# Altium PCB PCB1.PcbDoc (part 2 of 2)
Units mil, origin at the board's own origin, x right, y up, seen from the top; angles counter-clockwise.
Board outline 6000 x 4000 mil, 2 copper layers (Top Layer, Bottom Layer); 116 components, 72 nets, 335 pads, 101 vias.
Unrouted connection lines stored in the file: 3.
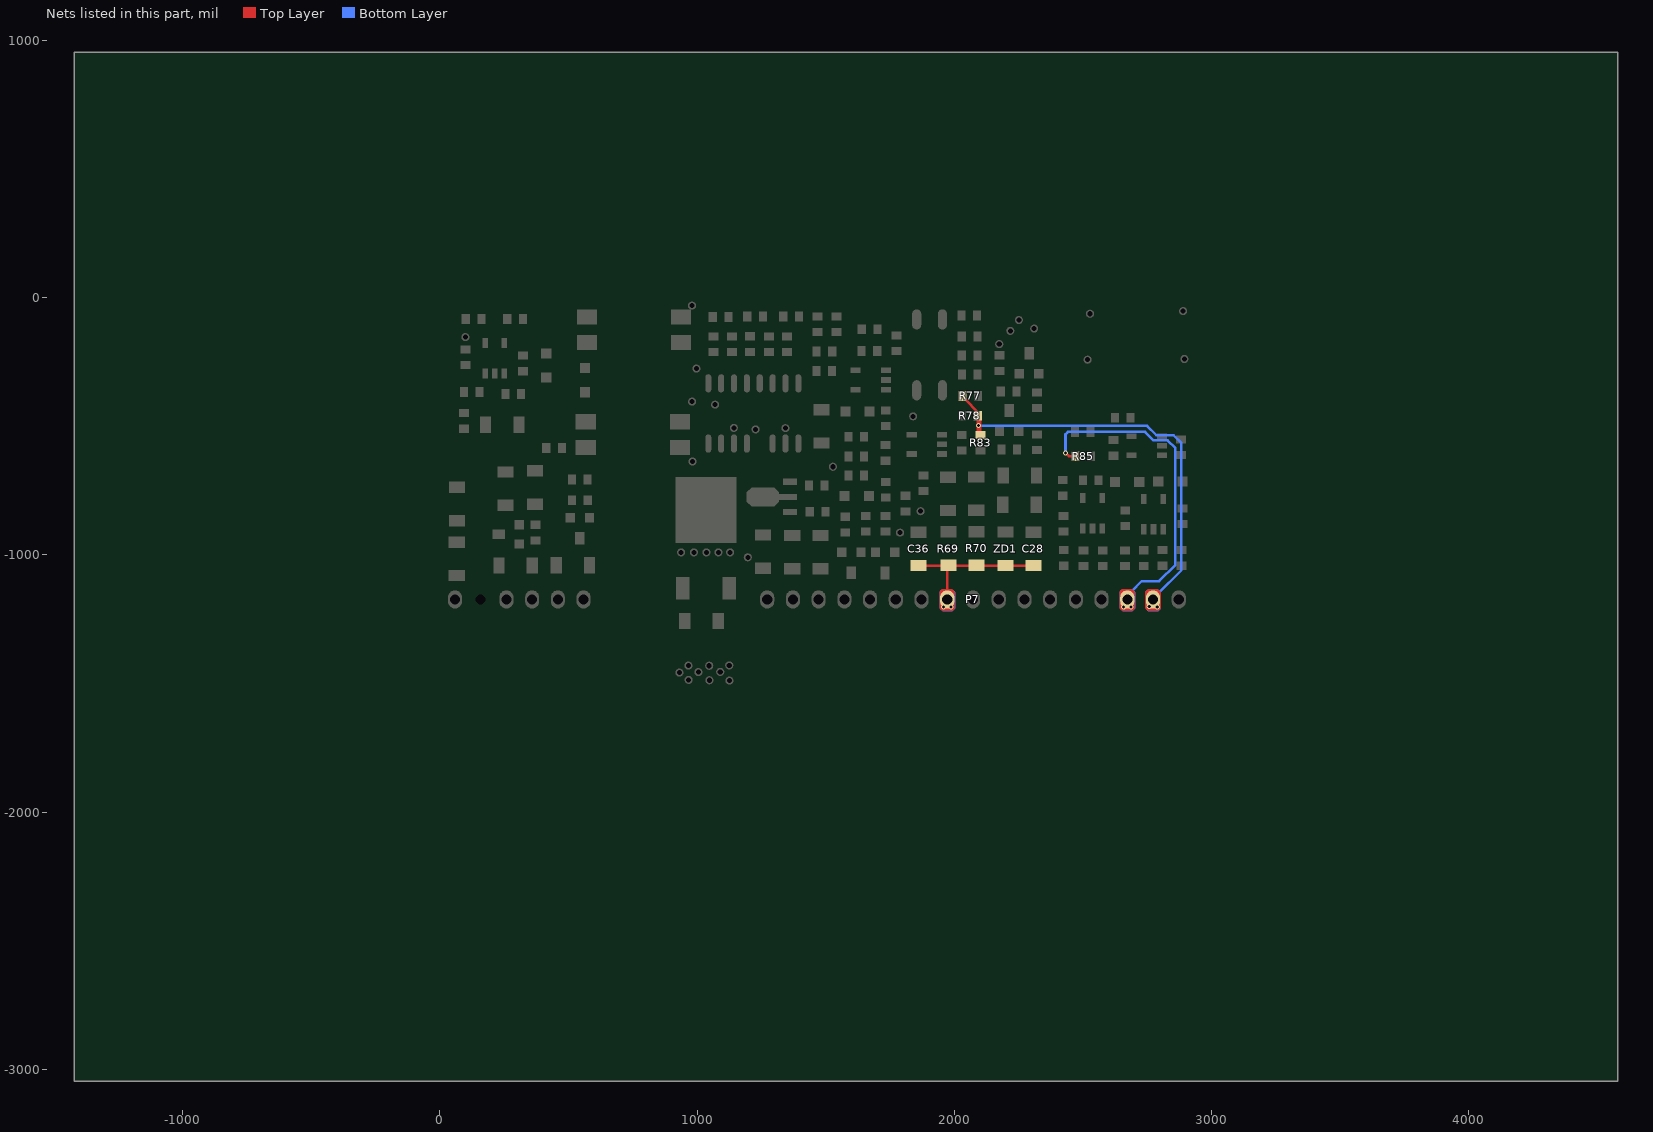
[diagram p2: the nets of this part, all layers, seen from the top]

## Via types
v1: diameter 19.68, hole 11.81, Top Layer to Bottom Layer, 101 vias

## Nets (pads, with @x,y where several pads share a name; then routed paths per layer and width w, separated by ;. In a path a pad name is that pad's centre, name@x,y a point inside that pad or via, vN(x,y) a via of type N, cw(c..) or ccw(c..) an arc to the next point about the centre after c; other vN are vias at no path point) (continued)
RX: P7.26 R77.1 R78.2 R83.1 | length 1794.7
  Top Layer w10: R77.1@2039.37,-376.97 2039.37,-391.93 2095.08,-447.64 2100.79,-447.64 2100.79,-527.17 R83.1@2105.12,-531.5 ; P7.26@2767.13,-1167.32 P7.26@2772.83,-1173.03
  Top Layer w19.68: R83.1@2097.05,-525.98 R78.2@2097.05,-452.56
  Bottom Layer w10: v1@2093.11,-498.43 2749.41,-498.43 2786.02,-535.04 2852.56,-535.04 2882.87,-565.35 2882.87,-1059.84 2790.35,-1152.36 2773.82,-1152.36 2773.82,-1177.16 P7.26@2781.1,-1184.45 ; P7.26@2772.83,-1173.03 2772.83,-1144.69 P7.26@2776.57,-1140.95
  other v1: 2789.17,-1202.76 2758.07,-1201.57 2095.08,-497.64
TX: P7.25 R85.2 | length 1250.7
  Top Layer w10: v1(2432.48,-603.15) 2445.87,-616.54 R85.2@2471.06,-616.54 ; P7.25@2672.83,-1173.03 P7.25@2681.69,-1164.17
  Bottom Layer w10: v1@2432.48,-602.36 2432.48,-531.5 2441.93,-522.05 2742.32,-522.05 2775.39,-555.12 2827.76,-555.12 ; P7.25@2688.39,-1142.91 2728.94,-1102.36 2795.87,-1102.36 2859.25,-1038.98 2859.25,-585.43 2828.94,-555.12
  other v1: 2658.86,-1202.76 2686.42,-1202.36
V+: C28.1 C36.1 P7.18 R69.1 R70.1 ZD1.2 | length 581.1
  Top Layer w10: C36.1@1861.42,-1041.57 C28.1@2307.87,-1041.57 ; P7.18@1972.83,-1173.03 1972.83,-1045.12 R69.1@1977.56,-1040.39
  other v1: 1958.46,-1202.36 1987.2,-1202.36
pads on no net: P7.19 P10.2
copper on no net: | length 78233.2
  Top Layer w7.87: 97.83,-449.61 134.05,-449.61 160.04,-475.59 160.04,-518.9 116.34,-562.6 116.34,-688.58 117.91,-690.16 186.42,-690.16 192.32,-684.25 192.32,-615.75 210.83,-597.24 317.13,-597.24 330.91,-583.46 330.91,-555.12 326.97,-551.18 258.86,-551.18 199.02,-491.34 ; 444.29,-679.13 466.34,-701.18 474.21,-701.18 ; 444.68,-687.8 452.56,-695.67 505.71,-695.67 510.43,-700.39 510.43,-701.97 ; 445.08,-522.05 480.51,-486.61 495.87,-486.61 ; 446.26,-696.85 460.04,-710.63 512.8,-710.63 ; 449.8,-696.06 449.8,-700.39 470.28,-720.87 504.13,-720.87 497.83,-714.57 471.46,-714.57 ; 513.98,-481.5 524.21,-481.5 530.12,-475.59 530.12,-478.35 533.27,-481.5 499.41,-481.5 495.08,-477.17 521.85,-477.17 528.94,-470.08 496.65,-470.08 484.45,-482.28 512.8,-482.28 530.91,-464.17 495.87,-464.17 469.09,-490.95 469.09,-495.28 471.46,-492.91 531.69,-492.91 530.12,-491.34 471.85,-491.34 475,-488.19 539.96,-488.19 ; 533.27,-503.15 453.35,-503.15 443.9,-512.6 443.9,-512.2 495.87,-460.24 551.38,-460.24 560.83,-469.69 560.83,-474.02 ; 578.94,-832.68 587.6,-841.34 595.87,-841.34 580.91,-826.38 580.91,-712.2 579.33,-710.63 574.21,-710.63 570.28,-714.57 570.28,-845.67 580.51,-855.91 580.91,-855.91 ; 580.91,-785.04 580.91,-716.54 582.87,-714.57 582.87,-839.76 589.96,-846.85 ; 1540.75,-653.94 1545.08,-653.94 1573.03,-681.89 1573.03,-697.24 ; 1575,-703.54 1542.72,-671.26 1519.88,-671.26 1514.76,-666.14 1514.76,-650.39 1522.64,-642.52 1537.99,-642.52 1581.3,-685.83 1584.05,-685.83 ; 1590.35,-175.98 1590.35,-55.12 1595.87,-49.61 1802.17,-49.61 1818.53,-65.97 ; 1593.11,-64.57 1602.56,-55.12 1785.63,-55.12 1786.02,-54.72 ; 1593.5,-60.24 1593.5,-58.27 1599.02,-52.76 ; 1725.39,-369.69 1725.39,-357.09 1728.15,-354.33 1719.49,-362.99 1719.49,-375.2 1723.03,-378.74 1745.08,-378.74 1750.2,-373.62 1750.2,-364.57 1744.29,-370.47 1744.29,-371.26 ; 1737.99,-356.69 1740.75,-353.94 1744.68,-353.94 1750.59,-359.84 1750.59,-383.46 ; 1821.04,-409.82 1822.22,-409.82 1823.82,-411.42 1823.82,-471.26 1829.33,-476.77 1847.05,-476.77 1854.53,-469.29 1854.53,-441.73 1831.69,-418.9 1831.69,-449.21 1830.51,-450.39 1830.51,-447.24 1841.93,-435.83 1841.93,-444.88 1849.02,-451.97 1849.02,-441.73 1846.26,-438.98 1845.87,-438.98 ; 1823.03,-70.47 1814.76,-62.2 1803.74,-62.2 1818.31,-76.77 1818.31,-85.04 1789.17,-55.91 1789.17,-55.12 1791.14,-53.15 1824.61,-53.15 ; 1833.27,-49.61 1789.17,-49.61 1778.94,-59.84 1783.27,-59.84 1831.69,-108.27 1856.89,-108.27 1860.83,-104.33 1860.83,-74.41 ; 1878.15,-636.61 1878.15,-659.84 1893.9,-675.59 ; 1937.2,-523.23 1939.17,-521.26 2002.95,-521.26 2026.57,-497.64 2026.57,-474.8 ; 1949.8,-572.44 1979.72,-572.44 2005.71,-598.43 2005.71,-619.69 2009.25,-623.23 2178.94,-623.23 2194.29,-607.87 2186.02,-607.87 2175.79,-618.11 2013.98,-618.11 2010.43,-614.57 2010.43,-601.57 2013.98,-605.12 2013.98,-611.81 2176.97,-611.81 ; 1954.92,-568.5 1957.28,-568.5 1958.46,-569.69 1988.39,-569.69 2001.77,-583.07 2179.72,-583.07 ; 2023.82,-512.2 2009.25,-526.77 2002.56,-526.77 2027.56,-501.77 2027.56,-493.31 ; 2029.33,-384.65 2029.33,-388.19 2081.69,-440.55 ; 2032.48,-465.35 2032.48,-516.14 2037.6,-521.26 2037.6,-464.57 2037.99,-464.17 ; 2093.9,-466.14 2095.08,-467.32 2095.08,-502.36 2115.94,-523.23 ; 2528.15,-416.93 2501.77,-416.93 2495.47,-410.63 2495.47,-284.25 2556.5,-223.23 2556.5,-220.08 ; 2587.2,-131.1 2580.51,-131.1 2495.47,-216.14 2495.47,-392.91 2519.49,-416.93 2730.12,-416.93 2742.72,-429.53 2742.72,-461.02 2753.74,-472.05 2906.89,-472.05 2919.49,-459.45 2919.49,-234.25
  Top Layer w10: 1200.98,-1276.77 1200.98,-1271.65 1208.86,-1263.78 ; 1215.54,-1074.8 1215.54,-1078.73 1223.03,-1086.22 1282.48,-1086.22
  Top Layer w11.81: 1111.61,-1325.98 1135.63,-1325.98 1157.28,-1304.33 1157.28,-1227.17 1176.97,-1207.48 1200.2,-1207.48 1214.76,-1192.91 1214.76,-1150 1228.15,-1136.61 1287.6,-1136.61 1293.5,-1142.52 ; 1146.26,-1133.07 1150.59,-1133.07 1190.75,-1092.91 1303.35,-1092.91 ; 1173.03,-1089.37 1216.73,-1089.37 1220.67,-1085.43 ; 1466.34,-1039.37 1466.34,-1036.61 1478.54,-1024.41 1510.83,-1024.41 1515.16,-1028.74 1515.16,-1031.1 ; 1495.47,-1051.18 1495.47,-1050.39 1518.7,-1027.17 ; 1568.31,-933.07 1586.02,-950.79 1688.39,-950.79 1703.35,-965.75 1703.35,-980.32 1694.69,-988.98 1693.5,-988.98 1683.27,-978.74 1683.27,-959.06 1676.97,-952.76 ; 2254.92,-1196.06 2254.92,-1238.19 2270.67,-1253.94 2479.72,-1253.94 2486.42,-1247.24 2486.42,-1220.47 2461.22,-1245.67 2461.22,-1246.85 2465.95,-1242.13 2476.97,-1242.13 2478.15,-1240.94 2478.15,-1220.47 2476.97,-1221.65 2476.97,-1239.37 2458.07,-1220.47 2458.07,-1219.69 2458.46,-1220.08 2458.46,-1235.04 2469.49,-1224.02 2469.49,-1216.14 ; 2269.49,-1173.62 2267.13,-1173.62 2249.02,-1191.73 2249.02,-1244.09 2268.31,-1263.39 2486.42,-1263.39 2495.87,-1253.94 2495.87,-1185.04 2486.02,-1175.2 2466.73,-1175.2 2449.41,-1192.52 2449.41,-1235.04 2434.84,-1249.61 2310.04,-1249.61 2295.87,-1235.43 2295.87,-1183.46 ; 2275,-1239.76 2275,-1227.95 2281.69,-1221.26 2281.69,-1243.7 2284.45,-1246.46 2275.39,-1246.46 2266.34,-1237.4 2266.34,-1222.05 2271.85,-1216.54 2284.84,-1216.54 2292.32,-1224.02 2292.32,-1248.03
  Top Layer w19.68: 43.5,-504.33 43.5,-719.69 57.28,-733.46 64.76,-733.46 ; 43.5,-347.24 56.1,-359.84 88.78,-359.84 90.75,-361.81 90.75,-370.87 89.96,-371.65 48.23,-371.65 45.47,-368.9 50.2,-364.17 91.54,-364.17 ; 43.5,-118.11 43.5,-88.58 56.5,-75.59 99.02,-75.59 99.02,-88.19 98.62,-88.58 64.37,-88.58 43.5,-109.45 43.5,-513.39 48.62,-518.5 86.42,-518.5 92.72,-512.2 ; 44.69,-383.86 63.58,-364.96 88.39,-364.96 ; 45.47,-498.43 54.53,-507.48 93.9,-507.48 87.2,-514.17 44.69,-514.17 52.95,-522.44 52.95,-726.38 ; 47.44,-1168.5 44.69,-1165.75 44.69,-1085.83 46.85,-1083.66 62.83,-1083.66 65.94,-1086.77 65.94,-1135.43 76.18,-1145.67 ; 53.35,-1141.34 53.35,-1119.29 81.3,-1091.34 ; 57.68,-879.13 51.77,-885.04 51.77,-942.52 56.89,-937.4 56.89,-874.8 58.46,-873.23 76.18,-873.23 77.76,-874.8 77.76,-939.76 63.58,-925.59 63.58,-874.8 63.19,-875.2 63.19,-943.7 ; 68.31,-735.04 68.31,-533.86 88.39,-513.78 86.42,-513.78 56.1,-544.09 56.1,-738.19 60.83,-733.46 78.94,-733.46 78.94,-538.19 98.23,-518.9 ; 82.87,-257.09 78.94,-261.02 78.94,-298.03 98.23,-278.74 98.23,-260.63 ; 84.05,-271.26 84.05,-292.52 78.54,-298.03 86.02,-298.03 127.76,-256.3 ; 85.24,-437.8 87.6,-435.43 145.87,-435.43 198.23,-487.8 198.23,-441.73 248.62,-391.34 248.62,-375.2 247.83,-374.41 244.69,-374.41 213.39,-343.11 213.39,-305.51 213.39,-334.06 187.99,-359.45 160.83,-359.45 151.77,-368.5 151.77,-397.24 113.58,-435.43 107.68,-435.43 93.5,-449.61 165.55,-449.61 171.06,-455.12 171.06,-492.52 191.93,-513.39 213.39,-491.93 213.39,-263.19 203.74,-253.54 110.43,-253.54 104.92,-259.06 106.5,-259.06 ; 88.39,-366.93 88.39,-351.97 125.79,-314.57 169.49,-314.57 173.43,-310.63 173.43,-291.34 167.91,-285.83 167.91,-297.24 156.1,-309.06 ; 89.57,-441.73 134.45,-441.73 173.03,-480.32 ; 89.96,-261.81 88.78,-261.81 78.54,-272.05 78.54,-297.64 117.13,-259.06 117.52,-259.06 ; 97.05,-194.49 105.31,-194.49 108.07,-197.24 180.91,-197.24 204.92,-221.26 312.8,-221.26 ; 100.98,-153.54 100.98,-192.52 99.8,-193.7 162.8,-193.7 174.61,-181.89 174.61,-170.87 173.43,-169.69 173.43,-173.23 158.46,-188.19 93.11,-188.19 95.47,-185.83 95.47,-155.12 96.26,-155.91 96.26,-172.44 112.01,-188.19 ; 107.68,-264.57 115.55,-264.57 124.61,-255.51 ; 137.6,-640.16 137.6,-560.24 175.79,-522.05 205.31,-522.05 245.08,-561.81 319.88,-561.81 319.49,-562.2 319.49,-577.17 310.83,-585.83 215.94,-585.83 182.09,-619.69 182.09,-677.56 181.69,-677.95 125.39,-677.95 128.15,-675.2 128.15,-563.78 137.2,-572.83 137.2,-668.11 143.5,-661.81 166.73,-661.81 169.49,-659.06 169.49,-606.69 204.13,-572.05 302.56,-572.05 295.87,-565.35 258.07,-565.35 239.57,-546.85 191.93,-546.85 186.42,-541.34 203.74,-541.34 205.71,-539.37 205.71,-543.31 221.85,-559.45 156.1,-559.45 141.14,-574.41 141.14,-645.28 148.23,-652.36 148.23,-573.62 161.22,-560.63 162.8,-560.63 178.94,-544.49 184.45,-538.98 184.45,-534.25 159.25,-559.45 159.25,-647.24 162.4,-644.09 162.4,-590.55 183.66,-569.29 169.49,-569.29 167.52,-571.26 ; 158.46,-420.47 165.94,-427.95 165.94,-548.03 ; 158.86,-83.07 254.53,-83.07 262.4,-90.94 262.4,-183.46 260.83,-185.04 252.17,-176.38 252.17,-97.64 242.32,-87.8 162.01,-87.8 171.46,-78.35 260.83,-78.35 ; 174.57,-426.74 174.57,-422.08 202.56,-394.09 182.87,-394.09 160.04,-416.93 164.76,-416.93 193.9,-446.06 171.06,-446.06 162.8,-437.8 180.91,-437.8 238.78,-379.92 173.03,-379.92 168.7,-375.59 168.7,-391.73 143.9,-416.54 143.9,-422.83 189.96,-468.9 189.96,-473.23 ; 175.79,-524.02 175.79,-457.09 ; 193.11,-516.54 193.11,-495.28 199.02,-489.37 199.02,-501.18 236.81,-538.98 ; 194.29,-502.36 194.29,-416.14 ; 223.82,-913.78 212.4,-925.2 212.4,-1059.84 214.37,-1061.81 214.37,-1054.33 227.36,-1041.34 227.36,-927.95 ; 224.61,-880.71 224.61,-894.09 241.54,-911.02 241.54,-876.38 236.42,-871.26 217.91,-871.26 212.4,-876.77 212.4,-1023.62 226.18,-1037.4 228.54,-1037.4 ; 230.91,-892.91 230.91,-901.97 240.75,-911.81 240.75,-1032.28 ; 240.35,-813.78 243.5,-813.78 269.09,-839.37 ; 245.47,-812.99 251.77,-812.99 270.28,-831.5 ; 248.23,-670.87 233.27,-670.87 226.18,-663.78 226.18,-636.61 236.02,-626.77 370.67,-626.77 407.28,-590.16 407.28,-318.11 414.76,-325.59 414.76,-588.58 409.25,-594.09 409.25,-673.62 395.47,-687.4 228.94,-687.4 226.18,-684.65 226.18,-660.24 230.91,-655.51 230.91,-651.57 238.39,-644.09 368.31,-644.09 393.11,-619.29 393.11,-638.58 384.45,-647.24 257.68,-647.24 246.65,-658.27 339.57,-658.27 347.44,-666.14 286.02,-666.14 285.63,-665.75 ; 307.68,-881.89 365.94,-881.89 370.28,-877.56 370.28,-808.27 376.18,-802.36 ; 308.46,-484.25 319.09,-473.62 319.09,-328.74 293.11,-302.76 262.4,-302.76 255.71,-296.06 255.71,-295.28 268.7,-282.28 313.58,-282.28 ; 310.04,-959.06 314.76,-959.06 329.33,-944.49 369.88,-944.49 367.91,-946.46 332.48,-946.46 321.46,-957.48 ; 310.19,-956.66 310.19,-957.33 317.43,-964.57 377.76,-964.57 381.69,-960.63 ; 312.44,-489.33 312.44,-283.42 ; 314.76,-376.77 314.76,-357.09 319.09,-352.76 319.09,-302.76 ; 324.61,-223.62 324.61,-222.05 325.79,-220.87 386.02,-220.87 399.02,-207.87 ; 325,-220.87 408.07,-220.87 411.22,-217.72 ; 326.97,-78.74 553.35,-78.74 557.68,-83.07 ; 333.27,-155.12 306.89,-155.12 301.38,-149.61 301.38,-133.86 302.95,-132.28 358.46,-132.28 373.43,-117.32 483.66,-117.32 503.74,-137.4 503.74,-217.72 513.19,-227.17 513.19,-299.61 495.87,-316.93 475.79,-316.93 467.13,-308.27 467.13,-191.73 445.47,-170.08 306.5,-170.08 301.38,-164.96 301.38,-143.31 304.13,-140.55 370.28,-140.55 382.09,-128.74 469.88,-128.74 492.32,-151.18 492.32,-228.35 499.02,-235.04 499.02,-290.16 487.6,-301.57 477.76,-301.57 481.3,-298.03 481.3,-162.6 471.46,-152.76 333.66,-152.76 344.68,-141.73 463.98,-141.73 472.24,-150 472.24,-177.56 457.28,-162.6 455.71,-162.6 ; 336.02,-790.95 336.02,-782.28 339.96,-778.35 504.53,-778.35 515.16,-788.98 517.91,-788.98 518.7,-788.19 518.7,-870.87 496.26,-893.31 486.42,-893.31 481.3,-888.19 317.52,-888.19 316.73,-887.4 475.39,-887.4 514.37,-848.43 514.37,-781.5 512.4,-779.53 342.32,-779.53 336.02,-785.83 336.02,-844.88 307.68,-873.23 302.95,-873.23 307.68,-877.95 365.16,-877.95 ; 364.37,-1047.24 364.37,-1066.54 454.13,-1156.3 454.13,-1166.54 ; 446.26,-1016.93 529.72,-933.46 538.39,-933.46 ; 455.71,-1030.32 455.71,-1014.17 536.81,-933.07 536.81,-934.65 542.32,-940.16 542.32,-942.91 459.25,-1025.98 ; 470.28,-599.21 495.08,-624.02 495.08,-631.89 ; 489.17,-605.91 505.31,-622.05 530.51,-622.05 528.94,-623.62 488.78,-623.62 501.77,-610.63 536.42,-610.63 536.42,-592.13 480.12,-592.13 477.36,-594.88 477.36,-638.19 481.3,-642.13 526.18,-642.13 575.79,-592.52 579.72,-592.52 ; 498.8,-888.8 513.98,-873.62 513.98,-786.61 506.89,-779.53 500.59,-779.53 495.08,-785.04 495.08,-892.52 508.86,-878.74 508.86,-791.73 ; 513.58,-362.99 523.43,-372.83 558.46,-372.83 564.76,-366.54 564.76,-362.6 ; 534.05,-564.17 521.85,-576.38 479.33,-576.38 478.54,-575.59 559.65,-575.59 563.98,-579.92 ; 550.59,-194.09 564.37,-207.87 564.37,-268.5 566.34,-266.54 566.34,-171.65 ; 555.32,-1166.54 555.32,-1143.7 571.46,-1127.56 571.46,-1068.5 584.06,-1055.91 584.06,-1055.51 582.87,-1056.69 582.87,-1125.98 566.34,-1142.52 ; 562.01,-362.2 560.83,-361.02 512.8,-361.02 517.52,-365.75 562.8,-365.75 ; 565.16,-266.93 565.16,-211.02 582.48,-193.7 ; 568.7,-1168.9 568.7,-1144.49 588.39,-1124.8 588.39,-1066.54 ; 917.52,-487.8 917.52,-467.72 981.69,-403.54 981.69,-407.48 925.79,-463.39 ; 918.7,-702.76 918.7,-692.13 920.28,-690.55 1128.54,-690.55 1163.58,-655.51 1065.16,-655.51 1045.87,-674.8 1051.38,-669.29 1131.69,-669.29 1120.28,-680.71 1056.5,-680.71 ; 926.57,-77.56 926.57,-76.77 977.76,-25.59 ; 932.09,-600 976.97,-644.88 989.96,-644.88 991.54,-643.31 991.54,-628.74 944.29,-581.5 936.02,-581.5 ; 934.84,-476.77 934.84,-467.32 989.17,-412.99 989.17,-398.43 986.42,-395.67 973.03,-395.67 970.28,-398.43 970.28,-418.9 ; 936.42,-269.69 936.81,-269.69 942.72,-263.78 1000.98,-263.78 1007.28,-270.08 1007.28,-279.53 1001.38,-285.43 965.94,-285.43 ; 940.75,-1092.13 967.13,-1092.13 970.67,-1095.67 970.67,-1273.62 1023.03,-1325.98 1208.86,-1325.98 1252.56,-1282.28 1252.56,-1177.56 1270.28,-1159.84 1290.16,-1159.84 1293.7,-1163.39 1293.7,-1323.82 1281.69,-1335.83 940.35,-1335.83 914.37,-1309.84 914.37,-1092.52 914.76,-1092.13 944.29,-1092.13 954.13,-1101.97 954.13,-1121.65 948.23,-1127.56 948.23,-1144.09 ; 952.17,-78.74 952.17,-67.72 984.06,-35.83 ; 959.65,-1018.11 1003.35,-1018.11 1032.87,-1047.64 1032.87,-1214.57 1073.03,-1254.72 ; 970.28,-285.43 940.75,-285.43 936.42,-281.1 936.42,-270.08 942.32,-264.17 988.39,-264.17 994.68,-270.47 994.68,-271.65 ; 985.63,-1016.54 1018.31,-1016.54 1035.63,-1033.86 1035.63,-1213.78 1076.97,-1255.12 1091.93,-1255.12 1092.32,-1254.72 1087.2,-1254.72 1041.93,-1209.45 1041.93,-1045.28 1063.98,-1023.23 ; 990.75,-692.91 1006.89,-692.91 1092.72,-607.09 1092.72,-482.28 1070.67,-460.24 ; 1001.77,-722.44 1001.77,-703.54 1059.25,-646.06 1260.43,-646.06 1295.47,-611.02 1295.47,-514.17 1283.66,-502.36 1283.66,-612.99 1310.04,-639.37 1416.34,-639.37 1447.44,-608.27 1447.44,-564.57 1455.32,-556.69 1489.96,-556.69 1494.69,-561.42 ; 1015.55,-535.83 1015.55,-554.33 1041.14,-579.92 1041.14,-581.1 ; 1039.17,-565.35 1039.17,-559.06 1014.76,-534.65 1025.79,-534.65 1044.29,-553.15 ; 1040.75,-581.1 1012.8,-553.15 1012.8,-532.28 1013.58,-531.5 1023.43,-531.5 1043.11,-551.18 1043.11,-554.33 ; 1043.9,-667.32 1030.51,-680.71 910.43,-680.71 909.25,-681.89 909.25,-1008.66 928.94,-1028.35 1109.25,-1028.35 1160.43,-977.17 1160.43,-679.92 1131.3,-650.79 1112.8,-650.79 1093.9,-631.89 1093.9,-558.66 ; 1043.9,-407.09 1050.98,-400 1150.2,-400 1152.17,-401.97 1152.17,-452.36 1141.14,-463.39 1119.09,-463.39 1094.69,-487.8 1094.69,-551.57 1093.11,-553.15 ; 1048.62,-500 1080.12,-500 1087.2,-492.91 1087.2,-471.26 1110.43,-448.03 1135.24,-448.03 1136.81,-446.46 1136.81,-414.57 1134.84,-412.6 1055.32,-412.6 1052.56,-415.35 1052.56,-485.43 1054.13,-483.86 1077.76,-483.86 1062.01,-468.11 1062.01,-425.59 1064.37,-427.95 1125,-427.95 1118.31,-434.65 1075.79,-434.65 1069.88,-440.55 1069.88,-462.2 1079.72,-472.05 1079.72,-454.72 1095.47,-438.98 ; 1049.41,-1222.83 1054.13,-1222.83 1058.86,-1227.56 1108.86,-1227.56 1116.73,-1235.43 1116.73,-1275.2 1113.58,-1278.35 1094.69,-1278.35 1103.74,-1269.29 1103.74,-1266.93 1104.13,-1266.54 1104.13,-1240.16 ; 1049.73,-401.26 1045.79,-401.26 1038.39,-408.66 1038.39,-490.95 1048.62,-501.18 1072.24,-501.18 1094.29,-523.23 1094.29,-573.62 ; 1057.68,-465.35 1069.09,-465.35 1090.35,-486.61 1090.35,-622.44 ; 1060.83,-638.58 1080.12,-638.58 1092.72,-625.98 ; 1063.58,-75.2 1063.58,-145.47 1065.16,-147.05 ; 1068.7,-948.82 1068.7,-978.74 1088.39,-998.43 1138.78,-998.43 1203.74,-933.46 1262.01,-933.46 1277.36,-918.11 1277.36,-820.87 1322.64,-775.59 1322.64,-767.72 1297.05,-742.13 1184.06,-742.13 1162.4,-720.47 ; 1070.28,-488.58 1070.28,-491.73 1087.6,-509.06 ; 1080.51,-479.13 1080.51,-433.46 ; 1089.17,-629.53 1223.03,-629.53 1256.5,-596.06 1256.5,-554.72 1284.05,-527.17 1284.05,-506.69 ; 1093.9,-581.1 1093.9,-609.84 1117.13,-633.07 1253.35,-633.07 1264.37,-622.05 1264.37,-548.82 1284.45,-528.74 1284.45,-508.66 ; 1095.47,-567.72 1095.47,-624.41 1110.83,-639.76 1285.63,-639.76 ; 1096.26,-325.98 1096.26,-276.77 1135.43,-237.6 1135.43,-217.72 ; 1097.05,-450.39 1097.05,-620.87 1127.36,-651.18 1131.69,-651.18 ; 1117.52,-68.5 1117.52,-66.93 1117.91,-67.32 1130.12,-67.32 1132.87,-70.08 1132.87,-120.87 1158.86,-146.85 1353.74,-146.85 1352.56,-148.03 1349.8,-148.03 1344.68,-153.15 1138.39,-153.15 ; 1126.18,-144.49 1126.18,-75.98 ; 1126.57,-1120.87 1126.57,-1065.35 1191.93,-1000 1202.17,-1000 1214.37,-1012.2 1214.37,-1023.62 1237.2,-1046.46 1264.76,-1046.46 1375.39,-1157.09 1366.73,-1157.09 1284.45,-1074.8 1215.54,-1074.8 1191.14,-1074.8 1169.49,-1096.46 1169.49,-1168.11 1166.73,-1170.87 1095.08,-1170.87 1095.08,-1096.85 1137.88,-1054.05 ; 1130.91,-69.29 1130.91,-116.93 1149.02,-135.04 ; 1132.87,-83.07 1132.87,-135.04 1144.29,-146.46 ; 1143.11,-503.15 1143.9,-503.94 1143.9,-565.35 ; 1144.29,-327.17 1144.29,-287.01 1201.77,-229.53 1201.77,-212.99 ; 1146.26,-727.17 1146.26,-690.55 1182.09,-654.72 1445.08,-654.72 1493.5,-703.15 1493.5,-733.46 ; 1148.23,-1157.87 1156.1,-1150 1156.1,-1095.67 1195.87,-1055.91 1230.12,-1055.91 1199.8,-1025.59 1199.8,-1012.2 1136.02,-1075.98 1136.02,-1081.89 1180.91,-1037.01 1193.5,-1037.01 1204.53,-1048.03 1207.28,-1048.03 1171.85,-1083.46 1145.08,-1083.46 1187.99,-1040.55 1197.83,-1040.55 ; 1190.35,-1283.46 1190.35,-1223.23 1228.94,-1184.65 1228.94,-1157.09 1238.39,-1147.64 1238.39,-1271.65 1197.83,-1312.2 1163.98,-1312.2 1180.91,-1295.28 1180.91,-1221.26 1167.13,-1235.04 1167.13,-1308.27 1160.04,-1315.35 1156.1,-1315.35 1181.3,-1290.16 1205.32,-1290.16 1226.57,-1268.9 1226.57,-1208.66 1191.54,-1243.7 1191.54,-1299.61 1217.13,-1274.02 1217.13,-1238.19 1196.26,-1259.06 1196.26,-1281.5 1200.98,-1276.77 1214.37,-1276.77 ; 1193.9,-325.59 1193.9,-297.64 1278.15,-213.39 1278.15,-212.99 ; 1194.29,-570.87 1192.32,-568.9 1192.32,-403.15 1198.23,-397.24 1273.82,-397.24 ; 1195.47,-562.2 1195.47,-553.94 1236.02,-513.39 1236.02,-417.32 1256.1,-397.24 1482.87,-397.24 1502.95,-417.32 1502.95,-425.98 1500.59,-428.35 1495.87,-428.35 1482.09,-442.13 1428.15,-442.13 1400.2,-470.08 1400.2,-587.8 1396.26,-591.73 1396.26,-590.55 1395.08,-589.37 1395.08,-476.38 1384.45,-465.75 1252.56,-465.75 1223.03,-495.28 ; 1203.35,-695.28 1316.32,-695.28 1335.22,-714.17 1438.39,-714.17 1440.75,-716.54 ; 1218.7,-635.04 1229.72,-635.04 1240.35,-624.41 1240.35,-568.9 1282.87,-526.38 ; 1219.49,-650.39 1250.2,-650.39 1286.42,-614.17 ; 1223.03,-633.46 1230.12,-633.46 1253.74,-609.84 ; 1255.71,-932.68 1258.07,-932.68 1336.81,-1011.42 1336.81,-1064.17 1358.86,-1086.22 1428.94,-1086.22 1452.17,-1109.45 1452.17,-1161.02 1469.88,-1178.74 ; 1258.86,-773.62 1258.86,-774.43 1267.5,-783.07 1500.98,-783.07 ; 1263.58,-922.05 1263.58,-930.32 1361.61,-1028.35 1496.7,-1028.35 1502.21,-1033.86 1502.21,-1076.33 1493.7,-1084.84 1493.7,-1154.72 ; 1272.24,-566.93 1272.24,-588.58 1319.09,-635.43 1417.13,-635.43 1463.19,-589.37 1463.19,-578.35 ; 1275,-767.32 1273.82,-767.32 1278.54,-772.05 1278.54,-764.17 1288.78,-774.41 1503.74,-774.41 1520.67,-791.34 1520.67,-855.12 1510.04,-865.75 1496.65,-865.75 1492.72,-861.81 1492.72,-689.37 1485.24,-681.89 1485.24,-599.61 1505.32,-579.53 ; 1278.54,-632.28 1289.17,-632.28 1298.62,-641.73 ; 1282.48,-751.97 1282.48,-753.54 1301.38,-772.44 1492.72,-772.44 ; 1292.32,-611.02 1326.97,-645.67 1452.95,-645.67 1465.55,-633.07 1465.55,-622.44 ; 1296.26,-696.06 1312.4,-696.06 1336.02,-719.69 1421.85,-719.69 1433.66,-731.5 ; 1317.13,-777.95 1493.11,-777.95 1503.74,-767.32 1503.74,-758.66 1503.35,-758.27 1503.35,-756.69 ; 1342.32,-1033.46 1353.74,-1044.88 1446.26,-1044.88 1469.49,-1068.11 1487.99,-1068.11 1478.54,-1077.56 1478.54,-1137.4 ; 1343.5,-507.09 1345.08,-508.66 1345.08,-566.54 ; 1350.59,-941.73 1353.74,-944.88 1540.35,-944.88 1567.91,-972.44 1567.91,-981.5 ; 1358.07,-832.68 1421.06,-832.68 1428.94,-824.8 1430.12,-824.8 1436.42,-831.1 1436.42,-857.09 1426.57,-866.93 1351.38,-866.93 1345.08,-860.63 1345.08,-842.52 1351.77,-835.83 1412.01,-835.83 1423.03,-846.85 1359.65,-846.85 1355.32,-851.18 1421.46,-851.18 1424.61,-854.33 ; 1362.01,-928.74 1362.01,-916.54 1350.98,-905.51 1573.82,-905.51 1578.94,-910.63 ; 1366.34,-1055.12 1381.69,-1055.12 1393.11,-1066.54 1448.62,-1066.54 1465.55,-1083.46 1465.55,-1130.32 1458.46,-1123.23 1458.46,-1102.36 1430.91,-1074.8 ; 1368.31,-925.98 1368.31,-924.02 1376.18,-916.14 1573.43,-916.14 ; 1372.47,-919.86 1385.29,-932.68 1525.79,-932.68 1557.68,-964.57 1557.68,-983.07 1561.22,-986.61 1566.34,-986.61 1569.88,-983.07 1569.88,-930.71 1582.09,-918.5 ; 1377.76,-136.61 1391.54,-122.83 1391.54,-94.09 1391.14,-93.7 1391.14,-111.42 1350.2,-152.36 1380.51,-152.36 1402.17,-130.71 1402.17,-83.07 1409.25,-75.98 1538.78,-75.98 1541.93,-72.83 ; 1380.51,-715.76 1410.84,-715.76 1430.91,-735.83 1434.84,-735.83 ; 1400.59,-324.8 1428.94,-324.8 1459.09,-294.65 ; 1401.38,-326.38 1402.17,-325.59 ; 1402.95,-71.26 1539.96,-71.26 ; 1421.46,-707.09 1413.98,-699.61 1200.59,-699.61 1199.41,-698.43 1199.41,-692.52 1202.56,-689.37 1420.28,-689.37 1440.35,-709.45 1440.35,-726.77 1438.39,-728.74 1436.81,-728.74 ; 1450.2,-638.98 1462.01,-627.17 1462.01,-615.35 1435.24,-642.13 1429.72,-642.13 1436.42,-648.82 1462.4,-648.82 1466.34,-644.88 1466.34,-590.94 1472.24,-590.94 1476.57,-595.28 1476.57,-661.42 ; 1456.1,-407.87 1456.5,-407.87 1467.13,-397.24 1530.91,-397.24 1574.21,-353.94 1612.4,-353.94 1612.8,-353.54 1612.8,-327.95 1619.88,-335.04 1619.88,-351.97 1619.88,-340.75 1613.39,-334.25 1593.9,-334.25 1567.13,-361.02 ; 1468.31,-663.39 1468.31,-664.96 1520.67,-717.32 1520.67,-838.19 1509.65,-849.21 1508.46,-849.21 1508.46,-729.53 ; 1470.28,-131.89 1541.14,-131.89 ; 1480.12,-783.86 1505.71,-809.45 1505.71,-813.39 ; 1482.48,-620.87 1484.05,-620.87 1505.71,-599.21 1536.81,-599.21 1524.61,-587.01 1518.7,-587.01 1516.34,-589.37 1510.43,-589.37 ; 1484.25,-639.37 1511.81,-611.81 1564.76,-611.81 1575,-622.05 1585.63,-622.05 1583.27,-619.69 1583.27,-609.06 1558.46,-609.06 1506.5,-557.09 1490.75,-557.09 ; 1496.06,-791.34 1478.35,-773.62 1477.36,-773.62 1506.1,-744.88 1506.1,-729.53 ; 1507.28,-408.27 1484.06,-431.5 1474.61,-431.5 1496.65,-431.5 1579.72,-348.43 1608.86,-348.43 1613.39,-352.95 1613.39,-347.64 ; 1510.04,-330.71 1523.03,-317.72 1523.03,-222.83 1526.97,-218.9 1526.97,-216.54 1529.33,-218.9 1529.33,-329.53 1532.09,-332.28 1532.09,-334.65 1530.12,-336.61 1500.2,-336.61 1525.79,-311.02 1525.79,-207.48 ; 1513.19,-930.32 1547.44,-930.32 1560.83,-943.7 ; 1527.76,-658.66 1526.18,-657.09 1526.18,-654.72 1529.72,-651.18 ; 1554.13,-1151.18 1554.13,-1140.16 1599.41,-1094.88 1599.41,-1068.9 1599.41,-1099.61 1565.94,-1133.07 1565.94,-1170.47 ; 1568.31,-933.07 1568.31,-917.72 ; 1571.46,-768.9 1571.46,-840.95 1574.61,-844.09 1574.61,-777.56 1579.72,-772.44 ; 1574.61,-994.88 1583.66,-985.83 1583.66,-918.11 ; 1576.18,-449.21 1576.18,-456.3 1585.63,-465.75 1585.63,-532.68 ; 1584.06,-1170.08 1584.06,-1126.38 1603.35,-1107.09 1603.35,-1076.38 ; 1585.24,-1161.81 1588.78,-1161.81 1591.54,-1159.06 1591.54,-1114.17 ; 1607.28,-273.23 1631.3,-273.23 1640.75,-263.78 1640.75,-208.27 ; 1647.05,-544.09 1647.05,-683.07 1650.98,-687.01 1650.98,-548.43 1648.23,-545.67 ; 1647.05,-509.45 1647.05,-537.8 1648.62,-539.37 1652.56,-535.43 1652.56,-506.69 1660.04,-499.21 1660.43,-499.21 1660.04,-499.61 1634.45,-499.61 1650.98,-516.14 1650.98,-540.16 ; 1655.32,-1144.49 1725.79,-1074.02 1731.69,-1074.02 ; 1656.89,-909.65 1656.89,-908.27 1659.25,-905.91 1853.74,-905.91 1845.87,-913.78 1665.16,-913.78 ; 1663.98,-1169.29 1669.88,-1169.29 1689.96,-1149.21 1689.96,-1122.05 ; 1663.98,-1155.12 1663.98,-1152.36 1734.84,-1081.5 ; 1667.52,-1153.54 1667.52,-1135.43 1726.57,-1076.38 ; 1669.09,-774.8 1730.91,-774.8 ; 1669.88,-772.44 1669.88,-779.92 1659.65,-790.16 1659.65,-833.86 1672.24,-846.46 1733.66,-846.46 1729.33,-842.13 1729.33,-780.71 1730.12,-779.92 1736.42,-779.92 1737.99,-781.5 1737.99,-841.73 ; 1678.54,-443.31 1726.18,-443.31 ; 1679.33,-909.06 1679.72,-909.06 1681.69,-907.09 1776.57,-907.09 1792.72,-890.94 ; 1689.17,-325.2 1693.11,-321.26 1731.3,-321.26 ; 1697.05,-208.66 1697.05,-257.48 1715.94,-276.38 1744.29,-276.38 ; 1697.44,-613.39 1717.52,-633.46 1731.69,-633.46 ; 1718.31,-909.06 1773.03,-909.06 1786.02,-922.05 1839.96,-922.05 ; 1725.39,-369.69 1725.39,-358.66 1727.36,-356.69 1734.45,-356.69 ; 1730.51,-505.91 1732.48,-507.87 1732.48,-568.9 1734.84,-566.54 1734.84,-501.57 ; 1732.87,-907.87 1765.16,-907.87 1789.17,-883.86 1845.08,-883.86 1865.16,-863.78 1865.16,-833.86 ; 1741.54,-905.51 1769.09,-905.51 1788.39,-886.22 ; 1774.21,-151.57 1803.35,-151.57 1852.95,-201.18 ; 1788.78,-142.52 1794.29,-142.52 1852.95,-201.18 ; 1793.5,-896.85 1856.5,-896.85 1865.94,-887.4 ; 1806.89,-827.95 1861.22,-827.95 ; 1811.61,-769.29 1811.61,-766.14 1817.13,-760.63 1817.13,-620.08 1826.57,-610.63 ; 1819.09,-762.6 1819.09,-627.95 1836.02,-611.02 1838.39,-611.02 ; 1830.91,-529.53 1840.75,-529.53 1904.53,-465.75 1904.53,-304.33 1930.51,-278.35 1959.65,-278.35 2027.76,-210.24 2027.76,-157.09 ; 1839.17,-532.28 1828.15,-532.28 1825.39,-529.53 1825.39,-522.44 1826.18,-521.65 1843.5,-521.65 1844.68,-522.83 ; 1851.77,-114.57 1846.26,-114.57 1826.18,-94.49 1826.18,-74.02 1835.24,-64.96 1850.2,-79.92 1850.2,-100.79 1826.18,-76.77 1826.18,-56.82 1827.49,-55.51 1851.77,-55.51 1855.31,-59.06 1855.31,-83.07 1857.28,-85.04 ; 1852.95,-367.72 1852.95,-201.18 ; 1852.95,-361.81 1852.95,-201.18 ; 1862.4,-847.64 1848.62,-833.86 1814.76,-833.86 1810.43,-829.53 1810.43,-826.77 1810.04,-826.38 1846.65,-826.38 1869.49,-803.54 1869.49,-782.68 ; 1871.06,-680.71 1874.21,-677.56 1965.55,-677.56 1978.15,-690.16 1978.15,-693.31 ; 1876.97,-909.84 1876.97,-757.09 ; 1880.51,-692.52 1880.91,-692.13 1931.69,-692.13 1945.87,-706.3 2078.94,-706.3 ; 1883.66,-920.87 1885.24,-919.29 1885.24,-746.85 1884.05,-745.67 ; 1952.56,-570.08 1984.25,-570.08 2004.13,-589.96 2180.91,-589.96 2180.91,-592.52 2175,-598.43 2039.57,-598.43 ; 1954.53,-64.96 1954.53,-71.26 1959.65,-76.38 2025.79,-76.38 2024.21,-74.8 2024.21,-62.99 2014.37,-72.83 1972.64,-72.83 1963.19,-63.39 ; 1956.1,-532.68 2021.85,-532.68 2027.56,-526.97 2027.56,-469.69 ; 1958.86,-353.15 1958.86,-342.13 2006.89,-294.09 2030.12,-294.09 ; 1960.43,-98.03 1979.72,-78.74 2019.49,-78.74 2025.39,-72.83 2025.39,-66.14 ; 1966.73,-1161.42 1966.73,-1080.32 1938.78,-1052.36 1850.2,-1052.36 1850.59,-1051.97 2310.04,-1051.97 2312.8,-1049.21 2312.17,-1049.21 2304.53,-1041.57 1873.27,-1041.57 1876.97,-1037.87 2312.32,-1037.87 2314.76,-1035.43 1878.54,-1035.43 1883.27,-1030.71 2297.05,-1030.71 2303.74,-1037.4 ; 2029.33,-216.54 2029.33,-147.64 ; 2087.6,-462.6 2087.6,-475.98 2095.08,-483.46 2095.08,-526.38 ; 2089.17,-288.58 2089.17,-152.76 ; 2092.32,-68.11 2127.76,-68.11 2171.85,-112.2 2171.85,-215.75 ; 2093.11,-377.17 2108.46,-377.17 2132.48,-401.18 ; 2175.39,-282.68 2189.17,-282.68 2256.5,-215.35 2287.2,-215.35 ; 2180.71,-367.72 2180.71,-405.32 2210.04,-434.65 ; 2182.09,-583.07 2185.24,-583.07 2245.47,-522.83 ; 2194.29,-669.69 2194.29,-659.06 2262.4,-590.94 2325,-590.94 ; 2251.77,-295.67 2251.77,-305.91 2247.05,-310.63 2247.05,-366.93 2308.46,-428.35 ; 2313.19,-793.31 2313.19,-712.6 2321.85,-703.94 2324.61,-703.94 2327.36,-706.69 2327.36,-791.73 2318.31,-800.79 2317.91,-800.39 2317.91,-690.94 ; 2322.44,-325.98 2310.63,-337.8 2293.9,-337.8 2293.5,-337.4 2293.5,-339.37 2314.76,-360.63 2323.43,-360.63 ; 2325,-371.26 2325,-368.5 2295.87,-339.37 2300.2,-339.37 2321.06,-360.24 2321.06,-307.09 2326.97,-301.18 2326.97,-362.2 2325.79,-363.39 ; 2375.79,-1161.42 2375.79,-1159.06 2437.6,-1097.24 2471.85,-1097.24 2502.17,-1066.93 2502.17,-1046.06 ; 2387.6,-728.74 2390.75,-728.74 2410.83,-708.66 ; 2399.02,-1075.2 2425.39,-1048.82 2425.39,-1040.16 ; 2420.28,-840.16 2420.28,-780.71 2430.51,-770.47 2499.8,-770.47 2501.38,-772.05 2501.38,-772.44 ; 2423.82,-907.87 2482.87,-907.87 2497.05,-893.7 ; 2424.21,-979.92 2424.21,-915.35 ; 2427.76,-836.22 2430.51,-833.46 2430.51,-775.59 ; 2428.15,-829.92 2428.15,-790.55 2440.35,-778.35 2486.81,-778.35 2493.9,-785.43 ; 2432.09,-603.94 2434.05,-603.94 2446.26,-616.14 2465.55,-616.14 ; 2477.36,-1163.39 2477.36,-1148.03 ; 2499.8,-986.61 2567.13,-986.61 2570.67,-983.07 ; 2501.38,-191.34 2501.38,-248.43 2508.86,-255.91 2902.56,-255.91 2913.58,-244.88 2913.58,-44.09 2905.31,-35.83 2510.43,-35.83 2501.38,-44.88 2501.38,-203.15 2516.73,-218.5 2550.98,-218.5 ; 2507.68,-982.28 2509.65,-980.32 2560.83,-980.32 2573.82,-967.32 ; 2537.2,-938.58 2537.6,-938.19 2537.6,-896.85 ; 2537.6,-884.25 2537.6,-858.27 2566.34,-829.53 2603.35,-829.53 2604.13,-830.32 2604.13,-842.52 2603.74,-842.91 2561.61,-842.91 2538.39,-866.14 2538.39,-897.64 ; 2559.25,-701.97 2560.04,-701.97 2567.13,-709.06 2612.01,-709.06 2619.49,-716.54 2619.49,-717.72 2620.67,-718.9 2614.76,-724.8 2590.35,-724.8 2584.45,-730.71 2584.45,-786.22 2582.48,-788.19 ; 2574.21,-978.74 2575.39,-978.74 2582.09,-972.05 2582.09,-894.09 2588.39,-887.8 2607.68,-887.8 2608.07,-888.19 2608.07,-921.26 2585.63,-943.7 2585.63,-968.5 ; 2575,-973.62 2575,-899.21 ; 2575,-778.35 2575,-723.23 2566.73,-714.96 2571.06,-710.63 2615.94,-710.63 ; 2577.36,-1044.88 2804.13,-1044.88 2804.53,-1044.49 2594.68,-1044.49 2589.57,-1039.37 2801.77,-1039.37 2804.53,-1042.13 2577.76,-1042.13 2573.03,-1046.85 2573.03,-1057.87 2569.09,-1061.81 2812.4,-1061.81 2816.34,-1057.87 ; 2577.36,-766.54 2577.36,-755.12 2604.53,-727.95 ; 2586.02,-732.68 2586.02,-742.13 2601.38,-757.48 2614.76,-757.48 2617.52,-760.24 2617.52,-780.32 2609.65,-788.19 2584.84,-788.19 2604.92,-768.11 2606.89,-768.11 2601.38,-762.6 2595.87,-762.6 ; 2589.57,-922.44 2589.57,-906.3 2596.65,-899.21 ; 2618.31,-615.75 2694.68,-615.75 2736.42,-657.48 2743.9,-657.48 ; 2626.57,-469.69 2626.57,-481.1 2676.57,-531.1 2698.23,-531.1 ; 2659.25,-971.26 2659.25,-898.82 2665.94,-892.13 2665.94,-890.16 ; 2663.19,-979.53 2663.98,-979.53 2670.67,-972.83 2670.67,-925.59 2693.11,-903.15 2721.85,-903.15 2728.15,-909.45 ; 2665.94,-885.04 2665.94,-890.55 2677.76,-902.36 2721.46,-902.36 2731.69,-892.13 ; 2666.73,-979.13 2666.73,-892.91 2667.91,-891.73 2671.06,-891.73 2683.66,-904.33 2737.2,-904.33 ; 2667.13,-827.17 2667.13,-825.2 2705.31,-787.01 ; 2726.97,-713.39 2787.6,-713.39 2789.96,-715.75 2789.96,-716.93 2786.42,-720.47 2727.36,-720.47 ; 2745.87,-854.33 2752.95,-854.33 2774.61,-875.98 2774.61,-891.34 ; 2763.58,-583.86 2765.16,-583.86 2773.43,-575.59 2841.14,-575.59 2864.76,-551.97 2883.66,-551.97 ; 2804.53,-506.69 2804.13,-507.09 2804.13,-533.46 2806.51,-531.09 2806.51,-508.67 ; 2810.43,-613.39 2874.61,-613.39 ; 2816.34,-780.71 2850.59,-780.71 2881.3,-811.42 2885.24,-811.42 2886.81,-809.84 2886.81,-717.32 ; 2856.1,-1142.52 2883.27,-1115.35 2883.27,-1045.28 ; 2880.12,-1170.87 2880.12,-1165.35 2881.69,-1163.78 2881.69,-1044.88 2886.42,-1049.61 2886.42,-1161.02 ; 2884.45,-978.35 2884.45,-968.9 2912.4,-940.95 ; 2705.31,-787.01 2725,-787.01 2737.99,-774.02 2737.99,-784.25 2735.24,-787.01 2705.31,-787.01
  Bottom Layer w10: 2741.93,-659.84 2743.11,-661.02
  Bottom Layer w19.68: 94.29,-151.97 95.08,-151.18 170.67,-151.18 174.21,-154.72 174.21,-981.1 265.16,-1072.05 265.16,-1179.53 ; 97.83,-153.54 157.68,-153.54 174.21,-170.08 ; 173.18,-153.7 162.8,-143.31 92.72,-143.31 89.96,-146.06 89.96,-156.69 94.29,-161.02 160.04,-161.02 174.21,-175.2 174.21,-196.85 ; 174.21,-611.81 174.21,-615.75 192.72,-634.25 192.72,-635.43 176.57,-651.57 ; 179.33,-637.4 510.83,-637.4 ; 232.48,-876.38 232.48,-735.43 259.65,-708.27 513.58,-708.27 547.44,-674.41 547.44,-395.28 512.8,-360.63 ; 1143.11,-505.91 1143.11,-498.82 1179.33,-462.6 1375.79,-462.6 1390.35,-477.17 1390.35,-532.68 1299.02,-624.02 1299.02,-1037.8 1318.7,-1057.48 1765.16,-1057.48 1857.68,-1150 ; 1196.26,-1009.45 1228.54,-977.17 1228.54,-512.6 1227.36,-511.42 ; 1343.9,-509.84 1343.9,-534.65 1270.28,-608.27 1270.28,-1053.54 1304.53,-1087.8 1717.13,-1087.8 1771.06,-1141.73 1771.06,-1153.15 ; 1368.31,-862.6 1514.76,-862.6 1528.54,-848.82 1528.54,-658.27 1530.12,-659.84 ; 1368.7,-863.78 1513.58,-863.78 1528.94,-848.43 1528.94,-654.72 1530.51,-656.3 1812.01,-656.3 1817.91,-650.39 1817.91,-483.07 1838.78,-462.2 ; 1455.71,-1295.28 1471.06,-1310.63 1489.96,-1310.63 1467.91,-1288.58 1467.91,-1220.47 1460.83,-1213.39 1460.83,-1262.99 1502.17,-1304.33 1512.01,-1304.33 ; 1469.49,-1171.65 1467.13,-1171.65 1452.17,-1186.61 1452.17,-1303.94 1468.7,-1320.47 2178.15,-1320.47 2194.09,-1304.53 2194.09,-1166.14 2192.91,-1164.96 2179.33,-1164.96 2152.95,-1191.34 2152.95,-1277.17 2140.75,-1289.37 1500.59,-1289.37 1494.09,-1282.87 1494.09,-1180.76 ; 1474.61,-1190.55 1474.61,-1254.72 1518.31,-1298.43 2147.05,-1298.43 2167.91,-1277.56 2167.91,-1212.6 2176.57,-1221.26 2175.39,-1222.44 2175.39,-1301.18 2167.91,-1308.66 2143.5,-1308.66 2157.68,-1294.49 2169.88,-1294.49 ; 1817.91,-655.12 1817.91,-485.04 1840.35,-462.6 ; 1817.91,-650.79 2374.21,-650.79 2468.31,-744.88 2468.31,-770.08 2686.42,-770.08 2702.95,-786.61 2702.95,-698.82 2744.29,-657.48 ; 2572.64,-1164.17 2572.64,-772.83
  other v1: 2058.86,-1201.18 2087.99,-1201.57

## Polygon pours and split planes (outlines as drawn)
GND2 on Bottom Layer "Bottom Layer-No Net" (solid, remove dead copper, pour order 1000): 904.53,-11.02 2943.11,-11.02 2945.08,-12.99 2945.08,-33.07 2945.08,-1073.62 2939.17,-1079.53 2938.39,-1080.32 2902.56,-1080.32 904.13,-1080.32 896.65,-1072.83 895.87,-1072.05 895.87,-44.88 895.87,-17.32 901.77,-11.42 902.17,-11.02 904.53,-11.02
GND on Bottom Layer "Bottom Layer-No Net" (solid, remove dead copper, pour order 1001): 15.16,-1048.43 200.53,-1048.43 251.19,-1100.39 580.86,-1100.39 594.68,-1086.22 609.65,-1070.87 609.65,-501.97 609.65,-44.09 594.68,-28.74 591.61,-25.59 295.32,-25.59 42.79,-25.59 28.97,-39.76 28.97,-1046.85 30.51,-1048.43

## Keep-outs
Keep-Out Layer:
  lines w3.94: 0,-1327.95 ccw(c50,-1327.95) 50,-1377.95 ; 0,-50 cw(c50,-50) 50,0 ; 2903.15,-1377.95 ccw(c2903.15,-1327.95) 2953.15,-1327.95 ; 0,-1377.95 904.33,-1377.95 904.33,-1515.75 1154.33,-1515.75 1154.33,-1377.95 2953.15,-1377.95 2953.15,0 0,0 0,-1377.95

## Other copper
Top Layer:
  rectangle net NTC-ADC: 2802.95,-943.31 2821.06,-913.78
  rectangle net NetC35_1: 1688.78,-442.13 1728.15,-427.56
  rectangle net GND2: 2498.23,-414.17 2528.94,-401.57
  rectangle net GND2: 2494.29,-405.51 2537.2,-248.82
  rectangle net GND2: 2732.87,-421.26 2741.14,-413.78
  rectangle net GND2: 2738.39,-425.59 2747.05,-413.78
  rectangle net GND2: 2744.68,-462.2 2749.41,-451.57
  rectangle net GND2: 2748.23,-470.08 2770.67,-450.79
  rectangle net GND2: 2902.17,-466.93 2915.55,-450
  rectangle net GND2: 2768.7,-470.87 2907.68,-445.67
  rectangle net GND2: 2744.29,-453.94 2917.52,-409.84
  rectangle net GND2: 2522.24,-415.75 2915.94,-245.67
  rectangle net GND2: 2875,-250 2912.01,-53.94
  rectangle net GND2: 2528.94,-83.46 2908.07,-36.61
  rectangle net GND2: 2502.56,-246.06 2532.09,-39.76
  rectangle net GND2: 2512.01,-250.39 2894.29,-67.72
  rectangle net GND2: 1084.84,-703.15 1102.56,-418.9
  rectangle net CJ-BO: 1254.28,-92.13 1337.6,-54.97
  rectangle net GND: 324.61,-873.23 336.81,-858.66
  rectangle net GND: 334.05,-882.68 496.65,-775.2
  region: 1151.77,-1394.88 907.28,-1394.88 907.28,-1513.39 1151.77,-1513.39
  rectangle net GND2: 911.22,-1021.26 1117.13,-944.88
  rectangle net GND2: 1110.43,-984.25 1152.95,-944.49
  rectangle net GND2: 1109.25,-1009.84 1125.39,-976.77
  rectangle net CI-15V: 917.13,-1320.47 969.49,-1115.35
  rectangle net CI-15V: 932.48,-1333.86 999.8,-1299.21
  rectangle net CI-15V: 996.26,-1332.68 1015.16,-1313.39
  rectangle net CI-15V: 961.22,-1313.78 992.72,-1285.43
  rectangle net CI-15V: 1251.38,-1328.74 1288.78,-1187.4
  rectangle net CI-15V: 1232.48,-1335.43 1259.25,-1295.67
  rectangle net CI-15V: 1217.91,-1335.04 1245.08,-1314.17
  rectangle net GND2: 1154.53,-802.76 1206.5,-736.61
  rectangle net GND2: 1143.11,-926.77 1271.85,-771.65
  rectangle net GND2: 1156.1,-954.33 1191.93,-917.32
  rectangle net GND2: 1182.09,-935.83 1198.23,-917.32
  rectangle net 15V-3: 1195.47,-466.14 1403.34,-397.24
  rectangle net 15V-3: 1197.83,-517.32 1231.3,-457.87
  rectangle net 15V-3: 1194.69,-534.06 1215.35,-508.27
  rectangle net 15V-3: 1391.54,-440.16 1489.57,-397.64
  rectangle net 15V-3: 1397.44,-457.09 1417.52,-435.04
  rectangle net GND2: 1851.38,-897.64 1884.84,-749.21
  rectangle net NetR69_2: 1955.32,-903.94 2001.38,-837.4
  rectangle net NetC37_1: 2064.37,-902.36 2111.22,-842.13
  rectangle net NetZD1_1: 2172.24,-907.87 2207.68,-832.68
  rectangle net V+: 1875,-1060.24 2313.19,-1025.98
  rectangle net V+: 1954.13,-1164.57 1988.39,-1045.28
Bottom Layer:
  region: 1151.77,-1394.88 907.28,-1394.88 907.28,-1513.39 1151.77,-1513.39
  rectangle net GND: 334.45,-1179.13 380.32,-1074.8
  rectangle net GND2: 909.25,-1021.26 1158.46,-953.94

## Silkscreen, mask and mechanical layers (free items; w line width, h text height)
Top Overlay:
  lines w3.94: 2588.78,-69.29 2553.74,-104.33 2553.74,-182.28 2585.63,-214.17 2839.96,-214.17 2878.94,-175.2 2878.94,-101.18 2846.65,-68.9 2589.57,-68.9 ; 632.48,-1208.27 871.06,-1208.27 871.06,-637.8 632.48,-637.8 632.48,-1208.27 ; 2379.53,-1115.35 2944.49,-1115.35 2944.49,-11.81 2379.53,-11.81 2379.53,-1115.35
  lines w7.87: 2379.53,-11.81 2379.53,-1115.35 2944.49,-1115.35 2944.49,-11.81 2379.72,-11.81
  lines w19.68: 682.09,-1188.98 682.09,-664.17
  text "测试GND2" at 2636.02,-54.72 h39.37
  text "500W LLC-控制板" at 2403.35,-332.28 h70.87
  text "硬件版:2020-04-05" at 2398.62,-406.3 h70.87
  text "输出:" at 726.97,-660.24 h98.43 r270
  text "继电器控制" at 449.02,-1229.13 h31.5 r270
  text "稳压15V" at 1366.73,-1229.53 h31.5 r270
  text "GND1" at 348.62,-1230.71 h31.5 r270
  text "15V不稳压" at 1267.13,-1230.71 h31.5 r270
  text "13V" at 249.8,-1231.5 h31.5 r270
  text "风扇控制" at 550.98,-1231.1 h31.5 r270
  text "直流母线" at 41.93,-1231.89 h31.5 r270
  text "5V" at 2568.31,-1235.43 h31.5 r270
  text "输出CS-" at 2265.94,-1236.61 h31.5 r270
  text "输出CS+" at 2364.37,-1235.83 h31.5 r270
  text "输出CS-" at 2464.37,-1235.83 h31.5 r270
  text "开关机" at 2663.19,-1236.61 h31.5 r270
  text "调压" at 2761.61,-1235.83 h31.5 r270
  text "10K-NTC" at 2861.61,-1235.83 h31.5 r270
  text "互感器+" at 1561.61,-1237.4 h31.5 r270
  text "互感器-" at 1661.61,-1237.4 h31.5 r270
  text "驱动A" at 1765.55,-1237.01 h31.5 r270
  text "输出+" at 1959.65,-1237.4 h31.5 r270
  text "NC" at 2059.65,-1237.4 h31.5 r270
  text "GND2" at 2163.58,-1237.01 h31.5 r270
  text "GND2" at 1463.19,-1238.19 h31.5 r270
  text "驱动B" at 1861.22,-1238.19 h31.5 r270
Bottom Overlay:
  rectangle: 8.86,-1220.47 2921.06,-1125.98
  text "GND2" at 1462.4,-1356.3 h31.5 r270
  text "驱动B" at 1860.43,-1356.3 h31.5 r270
  text "互感器+" at 1560.83,-1357.09 h31.5 r270
  text "互感器-" at 1660.83,-1357.09 h31.5 r270
  text "驱动A" at 1764.76,-1357.48 h31.5 r270
  text "输出+" at 1958.86,-1357.09 h31.5 r270
  text "NC" at 2058.86,-1357.09 h31.5 r270
  text "GND2" at 2162.8,-1357.48 h31.5 r270
  text "输出CS-" at 2265.16,-1357.87 h31.5 r270
  text "输出CS+" at 2363.58,-1358.66 h31.5 r270
  text "输出CS-" at 2463.58,-1358.66 h31.5 r270
  text "开关机" at 2662.4,-1357.87 h31.5 r270
  text "调压" at 2760.83,-1358.66 h31.5 r270
  text "10K-NTC" at 2860.83,-1358.66 h31.5 r270
  text "5V" at 2567.52,-1359.06 h31.5 r270
  text "直流母线" at 41.14,-1362.6 h31.5 r270
  text "13V" at 249.02,-1362.99 h31.5 r270
  text "风扇控制" at 550.2,-1363.39 h31.5 r270
  text "GND1" at 347.83,-1363.78 h31.5 r270
  text "15V不稳压" at 1266.34,-1363.78 h31.5 r270
  text "继电器控制" at 448.23,-1365.35 h31.5 r270
  text "稳压15V" at 1365.94,-1364.96 h31.5 r270
Top Solder:
  rectangle: 2597.83,-920.08 2615.16,-884.65
  rectangle: 2597.83,-790.16 2618.7,-755.12
  region: 1150.98,-1395.28 907.68,-1395.28 907.68,-1512.6 1150.98,-1512.6
Bottom Solder:
  region: 1151.77,-1394.88 907.28,-1394.88 907.28,-1513.39 1151.77,-1513.39